# Altium PCB HT1017-MAIN_PCB.PcbDoc
Units mm, origin at the board's own origin, x right, y up, seen from the top; angles counter-clockwise.
Board outline 15.88 x 20.83 mm, 2 copper layers (Top Layer, Bottom Layer); 15 components, 37 nets, 57 pads, 70 vias.
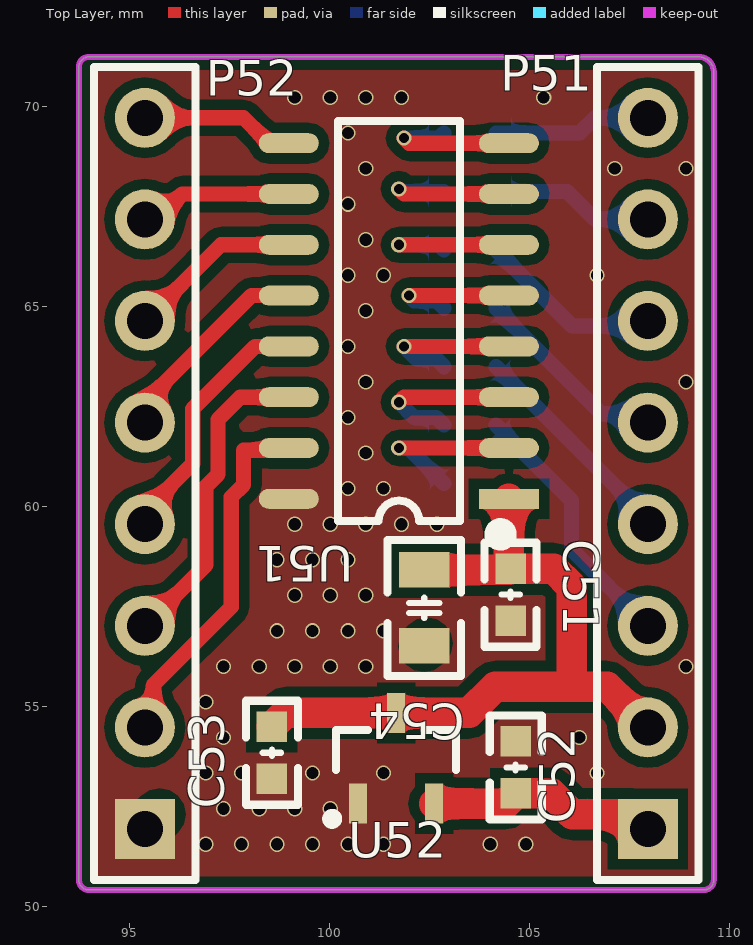
[diagram p0: Top Layer view]
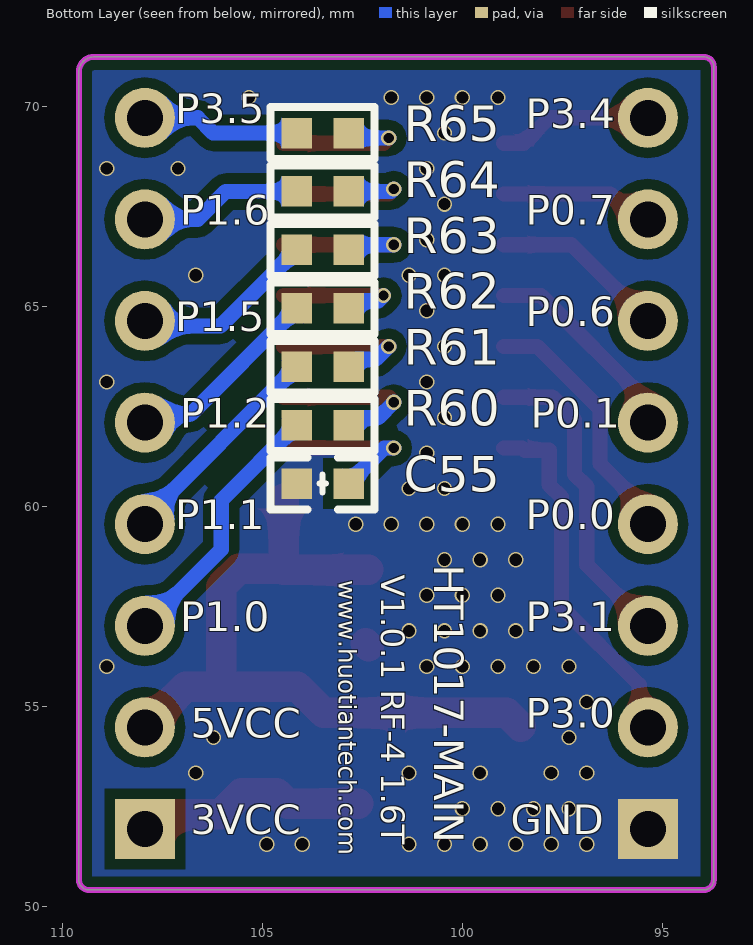
[diagram p1: Bottom Layer view, seen from below]
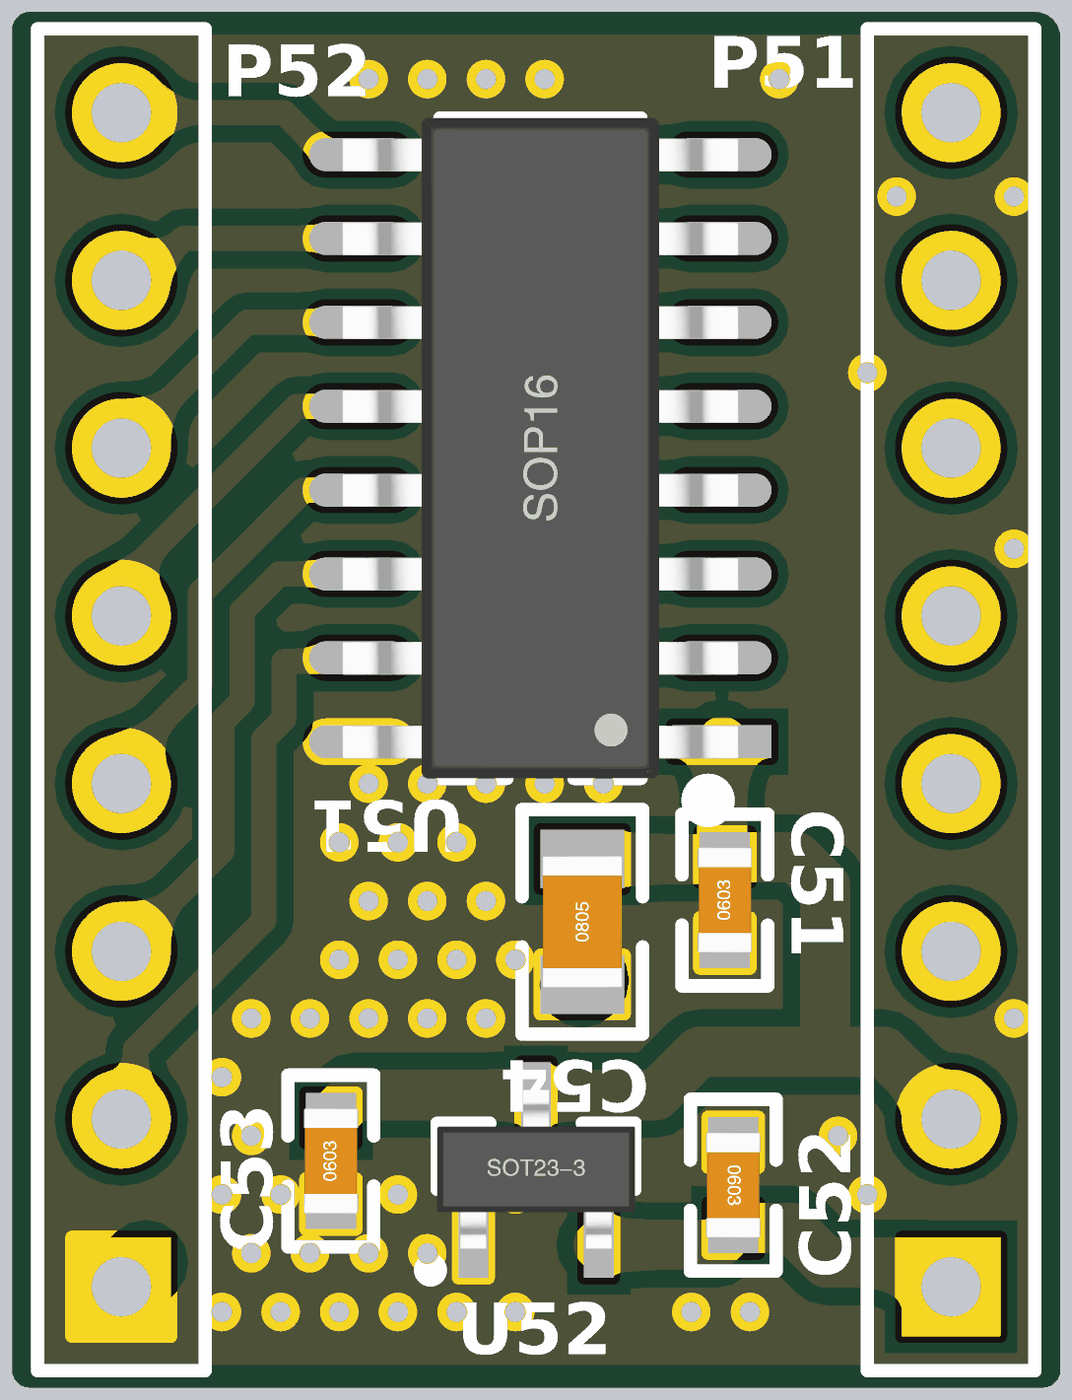
[diagram p2: 3D render of the assembled board from above, using the file's embedded part models]
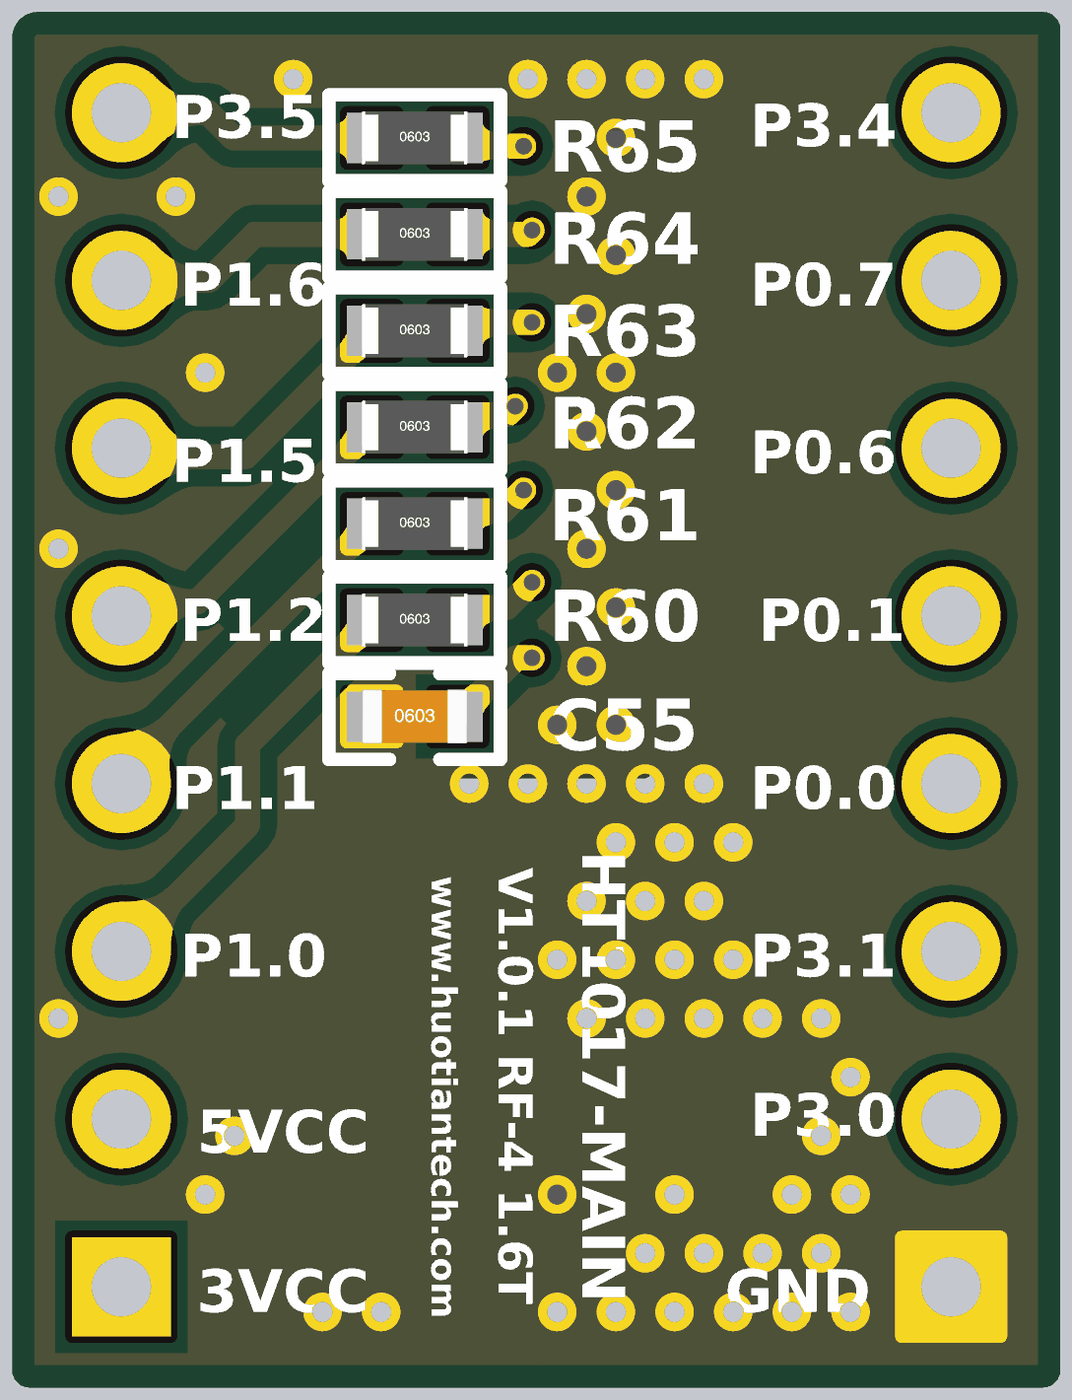
[diagram p3: 3D render of the assembled board from below, using the file's embedded part models]

## Layer stack, top to bottom
Top Solder: solder mask 0.0102, Solder Resist, Dk 3.5
Top Layer: signal copper 0.0356
Dielectric 1: dielectric 0.32, FR-4, Dk 4.8
Bottom Layer: signal copper 0.0356
Bottom Solder: solder mask 0.0102, Solder Resist, Dk 3.5

## Board outline
93.726,50.673 ccw(c93.98,50.673) 93.98,50.419 109.347,50.419 ccw(c109.347,50.673) 109.601,50.673 109.601,70.866 ccw(c109.22,70.866) 109.22,71.247 93.98,71.247 ccw(c93.98,70.993) 93.726,70.993

## Design rules (kind name [scope] priority, off if disabled: settings)
Clearance [All] p1: gap=0.254 ignorepadtopadclearanceinfootprint=FALSE except(0: Arc-Hole Track-Hole SMDPad-Hole THPad-Hole Via-Hole Fill-Hole Poly-Hole Region-Hole Text-Hole)
HoleSize [All] p1: absolutevalues=TRUE maxlimit=2.54 minlimit=0.254 maxpercent=80.000 minpercent=20.000
PlaneConnect [All] p1: planeconnectstyle=Direct reliefexpansion=0.508 reliefentries=4 reliefconductorwidth=0.254 reliefairgap=0.254
PolygonConnect [All] p1: connectstyle=Direct reliefconductorwidth=0.254 reliefentries=4 polygonreliefangle="90 Angle" airgapwidth=0.254
RoutingVias [All] p1: holewidth=0.381 width=0.762 viastyle="Through Hole" minholewidth=0.254 minwidth=0.381 maxholewidth=0.762 maxwidth=1.27
SolderMaskExpansion [All] p1: expansion=0.102
Width [All] p1: maxlimit=1.27 minlimit=0.254 preferedwidth=0.762
28 further rules are at their usual default settings.

## Components (designator, comment, footprint, x,y, rotation, side; value= is the part's Value field where it differs from the comment)
C51 "Cap" "C 0603_L" 104.521,57.8 r90 top value=1uF
C52 "Cap" "C 0603_L" 104.648,53.482 r270 top value=1uF
C53 "Cap" "C 0603_L" 98.552,53.848 r90 top value=104
C54 "Cap" "C 0805_L" 102.362,57.47 r90 top value=10uF
C55 "Cap" "C 0603_L" 103.505,60.579 r180 bottom value=223±5%
P51 "Header 8" HDR1X8 107.95,51.943 r90 top
P52 "Header 8" HDR1X8 95.377,51.943 r90 top
R60 "Res1" "R 0603_L" 103.505,62.04 r180 bottom value=3.3K
R61 "Res1" "R 0603_L" 103.505,63.5 r180 bottom value=3.3K
R62 "Res1" "R 0603_L" 103.505,64.961 r180 bottom value=3.3K
R63 "Res1" "R 0603_L" 103.505,66.421 r180 bottom value=3.3K
R64 "Res1" "R 0603_L" 103.505,67.882 r180 bottom value=3.3K
R65 "Res1" "R 0603_L" 103.505,69.342 r180 bottom value=3.3K
U51 "CA51F351S3" SOP16_L 101.727,64.643 r180 top
U52 "XC6206P302MR" SOT23-3L 101.661,53.721 r0 top

## Footprints (in the part's own frame and the unit in brackets; to place one, negate y for a bottom-side part, rotate by r counter-clockwise, add the part's x,y. Pads: shape width x height; smd on the part's side, far side on the other; paste and mask are expansions set on the pad)
"C 0603_L" [mil] "无极性贴片电容"
  rect 30x30 smd: 1(-25.59,0) 2(25.59,0)
  silkscreen extent -51,-26 51,26, body extent -31,-16 31,16, height 32
"C 0805_L" [mil] "无极性贴片电容                    @sucaita.com 素材塔"
  rect 35x50 smd: 1(-37.4,0) 2(37.4,0)
  silkscreen extent -67,-36 67,36, body extent -39,-24 39,24, height 20
HDR1X8 [mm] "Connector; Header; 8 Position"
  rect 1.5x1.5 hole 0.9: 1(0,0)
  round 1.5 hole 0.9: 2(2.54,0) 3(5.08,0) 4(7.62,0) 5(10.16,0) 6(12.7,0) 7(15.24,0) 8(17.78,0)
  silkscreen extent -1.27,-1.27 19.05,1.27
"R 0603_L" [mil] "1/10W贴片电阻"
  rect 30x30 smd: 1(-25.59,0) 2(25.59,0)
  silkscreen extent -51,-26 51,26, body extent -31,-16 31,16, height 16
SOP16_L [mm] "10.3*6.2*1.8mm（长宽高）"
  rect 1.5x0.5 smd: 1(-2.752,4.445)
  oval 1.5x0.5 smd: 2(-2.752,3.175) 3(-2.752,1.905) 4(-2.752,0.635) 5(-2.752,-0.635) 6(-2.752,-1.905) 7(-2.752,-3.175) 8(-2.752,-4.445) 9(2.752,-4.445) 10(2.752,-3.175) 11(2.752,-1.905) 12(2.752,-0.635) 13(2.752,0.635) 14(2.752,1.905) 15(2.752,3.175) 16(2.752,4.445)
  silkscreen extent -2.69,-5 1.52,5.49, body extent -3,-5 3,5, height 1.9
SOT23-3L [mm] "3x1.3x1mm(长宽高)"
  rect 0.45x1 smd: 1(-0.95,-1.143) 2(0.95,-1.143) 3(0,1.125)
  silkscreen extent -1.72,-1.65 1.5,0.7, body extent -1.5,-1.2 1.5,1.2, height 1.05

## Part data
C51 C52 C53 C54 C55: "电容", LatestRevisionDate=17-Jul-2002, LatestRevisionNote="Re-released for DXP Platform.", PackageDescription="Radial Cap, Thru-Hole; 2 Leads; 0.3 in Pin Spacing", PackageReference=RAD-0.3, Published=8-Jun-2000, Publisher="Altium Limited"
P51 P52: "Header, 8-Pin", LatestRevisionDate=17-Jul-2002, LatestRevisionNote="Re-released for DXP Platform.", Publisher="Altium Limited"
R60 R61 R62 R63 R64 R65: "电阻", LatestRevisionDate=17-Jul-2002, LatestRevisionNote="Re-released for DXP Platform.", PackageDescription="Axial Device, Thru-Hole; 2 Leads; 0.3 in Pin Spacing", PackageReference=AXIAL-0.3, Published=8-Jun-2000, Publisher="Altium Limited"
U52: "稳压IC"

## Via types
v1: diameter 0.381, hole 0.305, Top Layer to Bottom Layer, 63 vias
v2: diameter 0.381, hole 0.254, Top Layer to Bottom Layer, 7 vias

## Nets (pads, with @x,y where several pads share a name; then routed paths per layer and width w, separated by ;. In a path a pad name is that pad's centre, name@x,y a point inside that pad or via, vN(x,y) a via of type N, cw(c..) or ccw(c..) an arc to the next point about the centre after c; other vN are vias at no path point)
3.0V/VCC: C52.2 P51.1 U52.2 | length 5.8
  Top Layer w0.762: U52.2 104.394,52.578 C52.2 105.537,52.832 106.057,52.312 107.581,52.312 P51.1
5V/0.2A: 
5V/VCC: C51.2 C53.2 C54.2 P51.2 U51.1 U52.3 | length 18.4
  Top Layer w0.762: C53.2 98.9,54.846 U52.3 103.481,54.846 104.135,55.499 105.918,55.499 ; C54.2 104.491,58.42 104.479,58.432 U51.1 ; C51.2 105.599,58.45 106.045,58.004 106.045,55.626 105.918,55.499 ; P51.2 106.934,55.499 105.918,55.499
220V-N: 
GND: C51.1 C52.1 C53.1 C54.1 C55.1 P52.1 U51.16 U52.1 | length 0.6
  Top Layer w0.762: P52.1 P52.1@95.746,52.312 ; C54.1@102.357,56.515 C54.1 C54.1@102.425,56.583
  other v1: 96.901,51.562 97.79,51.562 98.679,51.562 99.568,51.562 100.457,51.562 101.346,51.562 104.013,51.562 104.902,51.562 97.346,52.451 98.234,52.451 99.123,52.451 100.013,52.451 96.901,53.34 97.79,53.34 99.568,53.34 101.346,53.34 106.68,53.34 97.346,54.229 106.236,54.229 96.901,55.118 97.346,56.007 98.234,56.007 99.123,56.007 100.013,56.007 100.901,56.007 108.902,56.007 98.679,56.896 99.568,56.896 100.457,56.896 101.346,56.896 99.123,57.785 100.013,57.785 100.901,57.785 98.679,58.674 99.568,58.674 100.457,58.674 99.123,59.563 100.013,59.563 100.901,59.563 101.79,59.563 102.679,59.563 100.457,60.452 101.346,60.452 100.901,61.341 100.457,62.23 100.901,63.119 108.902,63.119 100.457,64.008 100.901,64.897 100.457,65.786 101.346,65.786 106.68,65.786 100.901,66.675 100.457,67.564 100.901,68.453 107.124,68.453 108.902,68.453 100.457,69.342 99.123,70.231 100.013,70.231 100.901,70.231 101.79,70.231 105.346,70.231
HOT: 
Net220Vac-_1: 
NetC4_1: 
NetC4_2: 
NetC6_2: 
NetC55_2: C55.2 U51.2 | length 4.2
  Top Layer w0.381: v2(101.727,61.468) U51.2
  Bottom Layer w0.381: v2(101.727,61.468) 101.966,61.468 C55.2
NetD1_2: 
NetEC2_1: 
NetEC4_1: 
NetHOT1_1: 
NetQ1_3: 
NetQ2_1: 
NetQ2_3: 
NetR60_2: R60.2 U51.3 | length 4.2
  Top Layer w0.381: v2(101.727,62.611) 101.854,62.738 U51.3
  Bottom Layer w0.381: v2(101.727,62.611) 102.108,62.23 102.665,62.23 R60.2
NetR61_2: R61.2 U51.4 | length 3.8
  Top Layer w0.381: v2(101.854,64.008) U51.4
  Bottom Layer w0.381: v2(101.854,64.008) 102.172,63.69 102.665,63.69 R61.2
NetR62_2: R62.2 U51.5 | length 3.5
  Top Layer w0.381: v2(101.981,65.278) U51.5
  Bottom Layer w0.381: v2(101.981,65.278) 102.108,65.151 102.665,65.151 R62.2
NetR63_2: R63.2 U51.6 | length 3.9
  Top Layer w0.381: v2(101.727,66.548) U51.6
  Bottom Layer w0.381: v2(101.727,66.548) 102.728,66.548 R63.2
NetR64_2: R64.2 U51.7 | length 4
  Top Layer w0.381: v2(101.727,67.945) 101.854,67.818 U51.7
  Bottom Layer w0.381: v2(101.727,67.945) 101.791,67.881 R64.2
NetR65_2: R65.2 U51.8 | length 3.7
  Top Layer w0.381: v2(101.854,69.215) 101.981,69.088 U51.8
  Bottom Layer w0.381: v2(101.854,69.215) 102.728,69.215 R65.2
P0.0: P52.4 U51.13 | length 6.7
  Top Layer w0.381: P52.4@95.631,59.563 P52.4 95.377,59.878 96.572,61.073 96.572,62.444 98.135,64.008 U51.13
P0.1: P52.5 U51.12 | length 5.2
  Top Layer w0.381: P52.5 95.377,62.611 98.044,65.278 U51.12
P0.6: P52.6 U51.11 | length 4.4
  Top Layer w0.381: P52.6 97.282,66.548 U51.11
P0.7: P52.7 U51.10 | length 3.9
  Top Layer w0.381: P52.7 95.68,67.183 96.315,67.818 U51.10
P1.0: P51.3 R60.1 | length 6.6
  Bottom Layer w0.381: R60.1 106.041,60.154 106.041,58.932 P51.3
P1.1: P51.4 R61.1 | length 5.5
  Bottom Layer w0.381: R61.1 107.95,59.705 P51.4
P1.2: P51.5 R62.1 | length 5
  Bottom Layer w0.381: R62.1 106.798,62.317 107.736,62.317 P51.5
P1.5: P51.6 R63.1 | length 4.6
  Bottom Layer w0.381: R63.1 106.06,64.516 107.823,64.516 P51.6
P1.6: P51.7 R64.1 | length 4.1
  Bottom Layer w0.381: R64.1 105.93,67.881 106.628,67.183 P51.7
P3.0: P52.2 U51.15 | length 9.1
  Top Layer w0.381: P52.2 95.591,54.697 95.591,55.548 97.536,57.493 97.536,60.241 97.842,60.547 97.842,61.413 98.452,61.413 98.507,61.468 U51.15
P3.1: P52.3 U51.14 | length 7.9
  Top Layer w0.381: P52.3 96.901,58.547 96.901,60.504 97.207,60.81 97.207,62.181 97.763,62.738 U51.14
P3.4: P52.8 U51.9 | length 3.9
  Top Layer w0.381: P52.8 97.84,69.723 98.475,69.088 U51.9
P3.5: P51.8 R65.1 | length 4
  Bottom Layer w0.381: R65.1 106.247,69.342 106.628,69.723 P51.8

## Polygon pours and split planes (outlines as drawn)
GND on Bottom Layer "Bottom Layer-GND" (solid, remove dead copper, pour order 16): 92.329,73.152 110.998,73.152 110.998,46.101 108.839,43.942 88.9,43.942
GND on Top Layer "Top Layer-GND" (solid, remove dead copper, pour order 14): 92.329,72.898 109.22,72.898 111.506,70.612 111.506,48.26 92.964,48.26 92.71,48.514

## Keep-outs
Keep-Out Layer:
  the board outline again, w0.152

## Silkscreen, mask and mechanical layers (free items; w line width, h text height)
Bottom Overlay:
  text "P3.5" at 107.188,69.342 h1.27
  text "P3.4" at 98.425,69.215 h1.27
  text "P0.7" at 98.425,66.802 h1.27
  text "P1.6" at 107.061,66.802 h1.27
  text "P0.6" at 98.425,64.262 h1.27
  text "P1.5" at 107.188,64.135 h1.27
  text "P0.1" at 98.298,61.722 h1.27
  text "P1.2" at 107.061,61.722 h1.27
  text "P0.0" at 98.425,59.182 h1.27
  text "P1.1" at 107.188,59.182 h1.27
  text "HT1017-MAIN" at 100.965,58.547 h1.27 r90
  text "V1.0.1 RF-4 1.6T" at 102.235,58.293 h1.02 r90
  text "www.huotiantech.com" at 103.251,58.166 h0.76 r90
  text "P3.1" at 98.425,56.642 h1.27
  text "P1.0" at 107.061,56.642 h1.27
  text "P3.0" at 98.425,54.229 h1.27
  text "5VCC" at 106.807,53.975 h1.27
  text "GND" at 98.806,51.562 h1.27
  text "3VCC" at 106.807,51.562 h1.27